# EAGLE board BP_demo_v5b (EAGLE 5.07)
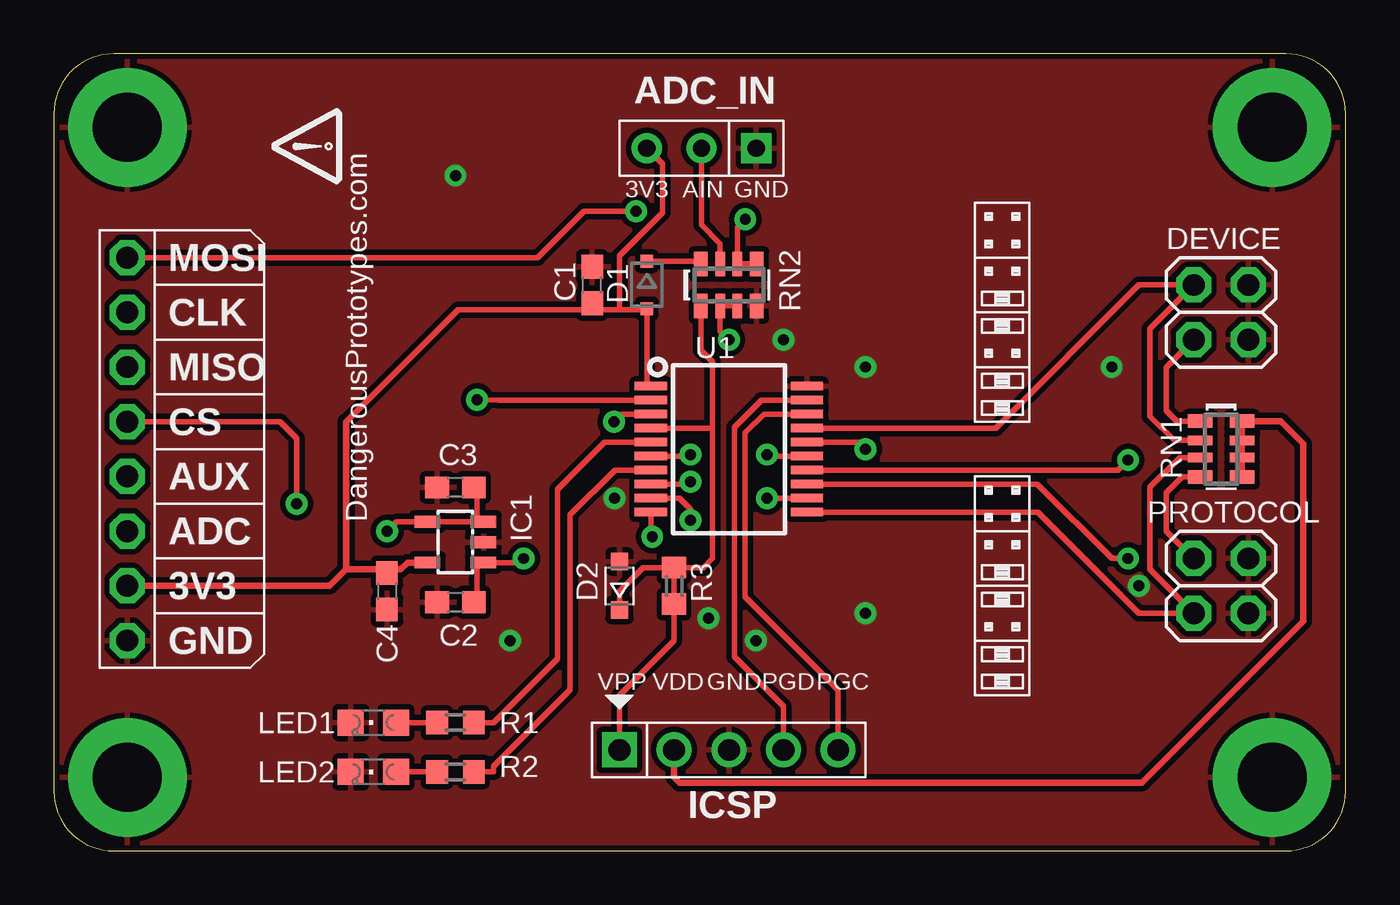
[diagram p0: board, top side]
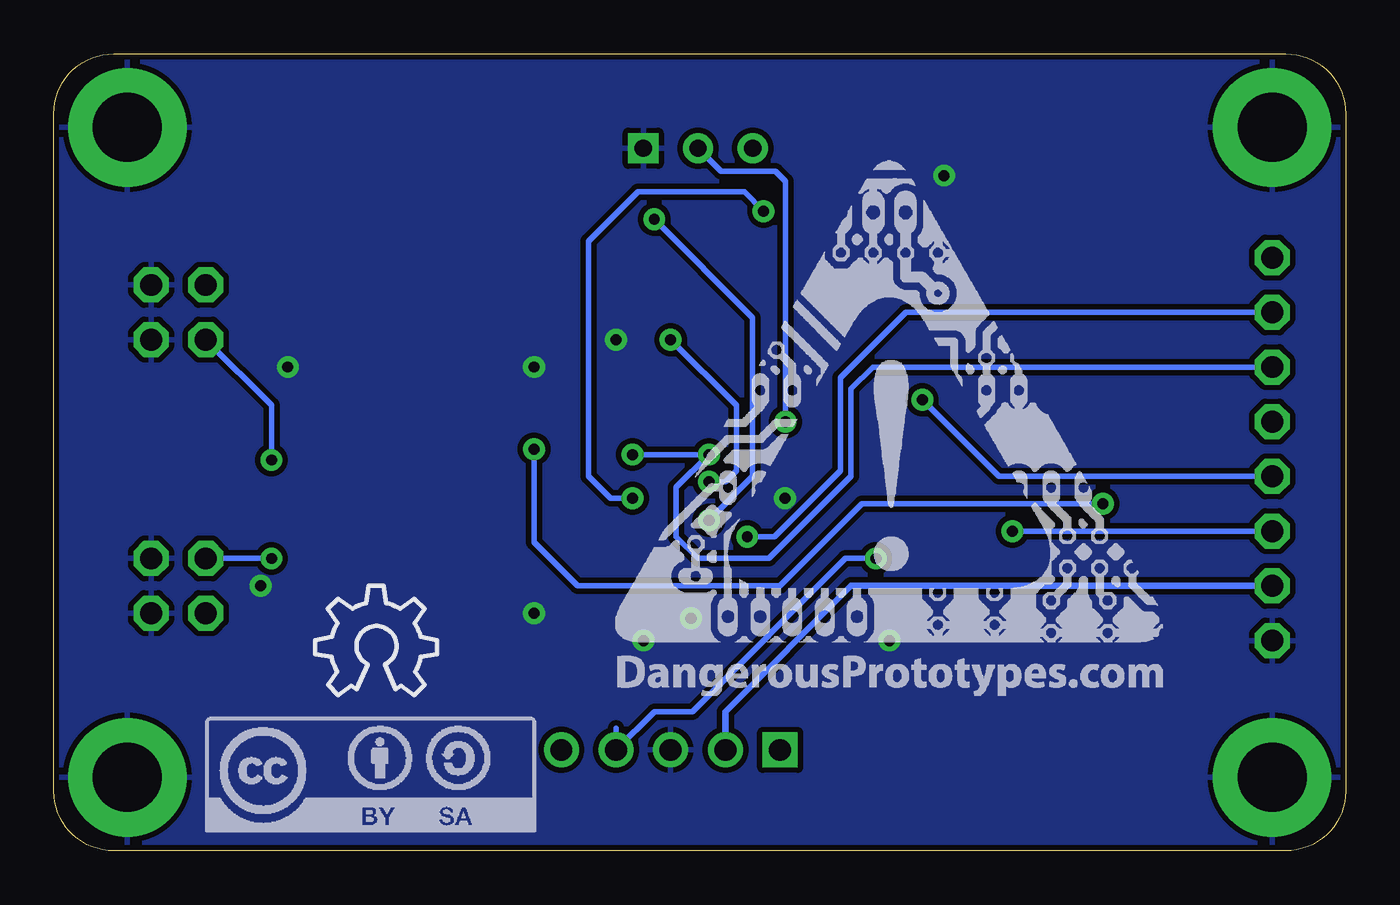
[diagram p1: board, bottom side, seen from below]

Size 60 x 37 mm. Coordinates in mm from the lower left corner, seen from the top.
Copper layers (1*16): Top 0.035mm / dielectric 1.5mm / Bottom 0.035mm
Design rules "SparkFun": minimum track width 8mil, minimum drill 20mil, track to track 8mil, track to pad 8mil, pad to pad 8mil, via to via 8mil, smd to smd 8mil, copper to edge 10mil, drill to drill 8mil, minimum pad ring 12mil, minimum via ring 10mil, stop-mask expansion 4mil, vias tented up to drill 25mil, thermal gap 10mil

## Footprints (pad centres in the part's own frame; a part is rotated, then mirrored left to right if it is on the bottom)
M1X3 = drill 0.8 square: 1 0,0 | drill 0.8 round: 2 2.54,0; 3 5.08,0
HDR-BUSPIRATE = drill 1.016 octagon: 1 -8.89,0; 2 -6.35,0; 3 -3.81,0; 4 -1.27,0; 5 1.27,0; 6 3.81,0; 7 6.35,0; 8 8.89,0
C603 = smd 1.1 x 1: 1 -0.85,0; 2 0.85,0
DO323 = smd 0.6 x 0.6: A 1.1,0; C -1.1,0
SOD-323F = smd 0.8 x 0.8: A 1.125,0; C -1.125,0
2X02 = drill 1.016 octagon: 1 -1.27,-1.27; 2 -1.27,1.27; 3 1.27,-1.27; 4 1.27,1.27
SOT-23-5 = smd 0.55 x 1.2: 1 -0.95,-1.3; 2 0,-1.3; 3 0.95,-1.3; 4 0.95,1.3; 5 -0.95,1.3
HEADER_PRG_1X05_ICSP_B = drill 1.016 square: 1 -5.08,0 | drill 1.016 round: 2 -2.54,0; 3 0,0; 4 2.54,0; 5 5.08,0
LED-805 = smd 1.2 x 1.2: A 0,-1.05; C 0,1.05
R603 = smd 1 x 1.1: 1 -0.85,0; 2 0.85,0
RN8P-4R-CRA06S = smd 0.63 x 1.15: 1 -1.295,-0.975; 4 1.295,-0.975; 5 1.295,0.975; 8 -1.295,0.975 | smd 0.44 x 1.15: 2 -0.4,-0.975; 3 0.4,-0.975; 6 0.4,0.975; 7 -0.4,0.975
SSOP20 = smd 0.4 x 1.5: 1 -2.925,-3.625; 2 -2.275,-3.625; 3 -1.625,-3.625; 4 -0.975,-3.625; 5 -0.325,-3.625; 6 0.325,-3.625; 7 0.975,-3.625; 8 1.625,-3.625; 9 2.275,-3.625; 10 2.925,-3.625; 11 2.925,3.625; 12 2.275,3.625; 13 1.625,3.625; 14 0.975,3.625; 15 0.325,3.625; 16 -0.325,3.625; 17 -0.975,3.625; 18 -1.625,3.625; 19 -2.275,3.625; 20 -2.925,3.625
PCB3.7X6 = drill 3.2 pad 5.5 round: P$1 3.81,33.99; P$2 3.81,3.81; P$3 56.99,33.99; P$4 56.99,3.81

## Placement (x,y rotation side)
ADC_IN  [M1X3]  32.62,32.62 180 top
BP  [HDR-BUSPIRATE]  3.41,18.65 270 top
C1  0.1uF  [C603]  25,26.27 90 top
C2  1uF  [C603]  18.65,11.54 0 top
C3  1uF  [C603]  18.65,16.87 180 top
C4  0.1uF  [C603]  15.47,12.05 270 top
D1  [DO323]  27.54,26.27 270 top
D2  [SOD-323F]  26.27,12.3 90 top
DEVICE  [2X02]  54.21,25 270 top
IC1  LMV321-SOT-23-5  [SOT-23-5]  18.65,14.33 90 top
ICSP  HEADER_PRG_PIC_ICSPB  [HEADER_PRG_1X05_ICSP_B]  31.35,4.68 0 top
LED1  [LED-805]  14.84,5.95 90 top
LED2  [LED-805]  14.84,3.66 90 top
PROTOCOL  [2X02]  54.21,12.3 270 top
R1  1k  [R603]  18.65,5.95 0 top
R2  1k  [R603]  18.65,3.66 0 top
R3  1k  [R603]  28.81,12.3 90 top
RN1  10k  [RN8P-4R-CRA06S]  54.21,18.65 270 top
RN2  10k  [RN8P-4R-CRA06S]  31.35,26.27 0 top
U1  PIC16F1829SS  [SSOP20]  31.35,18.65 270 top
U$1  [DP_LOGO_ART_1X1]  33.89,7.22 0 bottom
U$2  DINA4_L  [DP_LOGO]  12.76,32.71 90 top
U$3  JUMP2X2_DESC  [JUMP2X2_DESC]  46.59,25.64 0 top
U$4  JUMP2X2_DESC  [JUMP2X2_DESC]  46.59,12.94 0 top
U$5  PCB_STANDARD3.7X6  [PCB3.7X6]  -0.4,-0.4 0 top
U$6  [CC-BY-SA]  52.94,0.87 0 bottom
U$7  [OSHW_8X200_NOTEXT]  47.86,7.22 0 bottom

## Library data of the parts
ADC_IN BP C1-C4 D1 D2 IC1 ICSP LED1 LED2 R1-R3 RN1 RN2 U1 U$5 U$6 = dp_devices
DEVICE PROTOCOL = pinhead
U$1 U$4 = DP2
U$2 = DP2; URL2: DangerousPrototypes.com
U$3 = DP2; OPT1: ADC; OPT2: DAC; OPT3: MEM; OPT4: PWM
U$7 = ohw-logo

## Nets
+3V3: ADC_IN.3 BP.7 C1.1 C4.1 D1.A IC1.5 ICSP.2 RN1.5 RN1.6 RN1.7 RN1.8 U1.1
ADC_IN0: ADC_IN.2 RN2.7 U1.3
ADC_IN1: RN2.2 RN2.3 U1.8
ADC_IN2: RN2.5 RN2.6 U1.9
AUX: BP.5 U1.2
CLK: BP.2 U1.10
CS: BP.4 U1.16
DACOUT: BP.6 C3.1 IC1.3 IC1.4
GND: ADC_IN.1 BP.8 C1.2 C2.1 C3.2 C4.2 D2.A DEVICE.2 DEVICE.4 IC1.2 ICSP.3 LED1.C LED2.C PROTOCOL.2 PROTOCOL.4 RN2.4 U1.20 U$5.P$1 U$5.P$2 U$5.P$3 U$5.P$4
MCLR: D2.C ICSP.1 R3.1 R3.2 RN2.1 U1.4
MISO: BP.3 U1.6 U1.15
MOSI: BP.1 U1.12
N$1: R1.2 U1.5
N$2: LED1.A R1.1
N$7: LED2.A R2.1
N$10: R2.2 U1.7
N$11: D1.C RN2.8
PGC: ICSP.5 U1.18
PGC/DAC: C2.2 IC1.1 ICSP.4 U1.19
X1: DEVICE.1 RN1.2 U1.17
X2: DEVICE.3 RN1.1 U1.14
Y1: PROTOCOL.1 RN1.4 U1.13
Y2: PROTOCOL.3 RN1.3 U1.11

## Tracks (layer width: path | path; a pad name or v marks a point on that pad's centre or on a via)
+3V3
  Top 0.254: 13.57,19.92 18.77,25.12 25,25.12 | ADC_IN.3 28.27,31.9 28.27,29.63 26.27,27.64 26.27,25.12 | 25,25.12 26.27,25.12 | 26.27,25.12 27.54,25.12 D1.A 27.54,22.46 27.54,21.58 | C1.1 | 25,25.12 C1.1
  Top 0.305: RN1.5 RN1.6 RN1.7 RN1.8 56.98,19.95 58.02,18.9 58.02,10.65 50.53,3.16 29.06,3.16 28.81,3.41 ICSP.2 | 27.54,21.58 U1.1 | BP.7 12.81,12.3 13.57,13.06 | IC1.5 16.43,13.38 16.11,13.06 15.64,13.06 C4.1 15.47,12.94 15.6,13.06 13.57,13.06 | 13.57,13.06 13.57,19.92
  Bottom 0.305: ICSP.2 28.81,6.46 22.97,12.3 BP.7
ADC_IN0  (via drill 0.51)
  Top 0.254: ADC_IN.2 30.08,29.06 30.95,28.19 RN2.7 | U1.3 26.37,20.28 v26.02,19.92
  Bottom 0.254: v26.02,19.92 26.02,31.1 26.48,31.56 29.02,31.56 ADC_IN.2
ADC_IN1  (via drill 0.51)
  Top 0.254: RN2.3 RN2.2 30.95,24.13 v31.35,23.73 | v29.57,17.13 29.47,17.03 U1.8
  Bottom 0.254: v31.35,23.73 28.3,20.68 28.3,17.63 28.81,17.13 v29.57,17.13
ADC_IN2  (via drill 0.51)
  Top 0.254: RN2.5 RN2.6 31.75,28.96 v32.11,29.32 | v29.57,15.35 29.57,15.86 29.05,16.38 U1.9
  Bottom 0.254: v32.11,29.32 27.54,24.75 27.54,17.38 v29.57,15.35
AUX  (via drill 0.51)
  Top 0.254: U1.2 20.67,20.93 v19.67,20.94
  Bottom 0.254: v19.67,20.94 16.11,17.38 BP.5
CLK  (via drill 0.51)
  Top 0.254: U1.10 27.73,14.65 v27.79,14.59
  Bottom 0.254: v27.79,14.59 26.52,14.59 23.48,17.63 23.48,21.95 20.43,25 BP.2
CS  (via drill 0.51)
  Top 0.254: BP.4 10.52,19.92 11.28,19.16 v11.28,16.11 | U1.16 37.38,18.98 v37.7,18.65
  Bottom 0.254: v11.28,16.11 22.46,16.11 26.27,12.3 35.67,12.3 37.7,14.33 v37.7,18.65
DACOUT  (via drill 0.51)
  Top 0.254: v15.47,14.84 15.92,15.28 IC1.4 19.41,15.28 | 19.41,15.28 IC1.3 | C3.1 19.67,16.87 19.67,15.54 19.41,15.28
  Top 0.305: IC1.3 19.67,15.28 19.67,15.35
  Bottom 0.254: BP.6 v15.47,14.84
GND  (via drill 0.51)
  other vias: 37.7,22.46 33.89,23.73 37.7,11.03 21.19,9.76 18.65,31.35 26.05,16.36 30.41,10.79 49.13,22.46 32.62,9.76 50.4,12.3
  pour Bottom (isolate 0.254): -0.4,-0.4 60.56,-0.4 60.56,37.7 -0.4,37.7
  pour Top (isolate 0.254): -0.4,-0.4 60.56,-0.4 60.56,37.7 -0.4,37.7
MCLR
  Top 0.254: 30.59,19.67 30.59,22.71 30.05,23.25 RN2.1 | U1.4 30.55,19.62 30.59,19.67 | 30.59,19.67 30.59,19.66 30.59,13.57 30.17,13.15 R3.2 | R3.2 27.37,13.15 26.27,12.05 D2.C | D2.C | ICSP.1 26.27,7.22 28.81,9.76 R3.1 R3.2
MISO  (via drill 0.51)
  Top 0.254: U1.6 29.5,18.33 v29.57,18.4 | v33.13,18.4 33.2,18.33 U1.15
  Bottom 0.254: v33.13,18.4 v29.57,18.4 31.1,16.87 31.1,14.59 30.08,13.57 26.78,13.57 22.97,17.38 22.97,21.44 21.95,22.46 BP.3
MOSI  (via drill 0.51)
  Top 0.254: U1.12 33.14,16.38 v33.13,16.36 | BP.1 22.46,27.54 24.62,29.7 v27.03,29.7
  Bottom 0.254: v33.13,16.36 34.14,16.36 35.16,17.38 35.16,28.3 32.87,30.59 27.92,30.59 v27.03,29.7
N$1
  Top 0.254: U1.5 25.58,18.98 23.39,16.78 23.39,8.91 20.43,5.95 R1.2
N$2
  Top 0.254: LED1.A R1.1
N$7
  Top 0.254: LED2.A R2.1
N$10
  Top 0.254: U1.7 26.06,17.68 23.98,15.6 23.98,7.47 20.43,3.92 20.43,3.66 R2.2
N$11
  Top 0.254: D1.C 30.05,27.37 RN2.8
PGC
  Top 0.254: ICSP.5 36.43,7.47 32.11,11.79 32.11,19.41 32.98,20.28 U1.18
PGC/DAC  (via drill 0.51)
  Top 0.254: ICSP.4 33.89,6.71 31.6,9 31.6,19.67 32.86,20.93 U1.19 | C2.2 19.67,11.7 19.67,13.32 19.73,13.38 IC1.1 21.64,13.38 v21.83,13.57
  Bottom 0.254: 33.89,5.7 ICSP.4 32.11,6.46 30.33,6.46 23.22,13.57 v21.83,13.57
X1
  Top 0.254: RN1.2 52.03,19.05 50.91,20.17 50.91,24.24 DEVICE.1 50.4,26.27 43.76,19.62 U1.17
X2  (via drill 0.51)
  Top 0.254: RN1.1 52.15,19.95 51.67,20.43 51.67,22.46 DEVICE.3 | U1.14 49.43,17.68 v49.89,18.14
  Bottom 0.254: v49.89,18.14 49.89,20.68 DEVICE.3
Y1  (via drill 0.51)
  Top 0.254: RN1.4 52.41,17.36 51.67,16.62 51.67,14.84 PROTOCOL.1 | U1.13 45.68,17.03 49.13,13.57 v49.89,13.57
  Bottom 0.254: v49.89,13.57 PROTOCOL.1
Y2
  Top 0.254: RN1.3 52.29,18.25 50.91,16.87 50.91,13.06 PROTOCOL.3 50.4,11.03 45.7,15.72 U1.11

## Text on the board
tNames: 3V3 | AIN | GND | DangerousPrototypes.com | VPP | VDD | GND | PGD | PGC